# EAGLE board CatFeeder-Com (EAGLE 7.4.0)
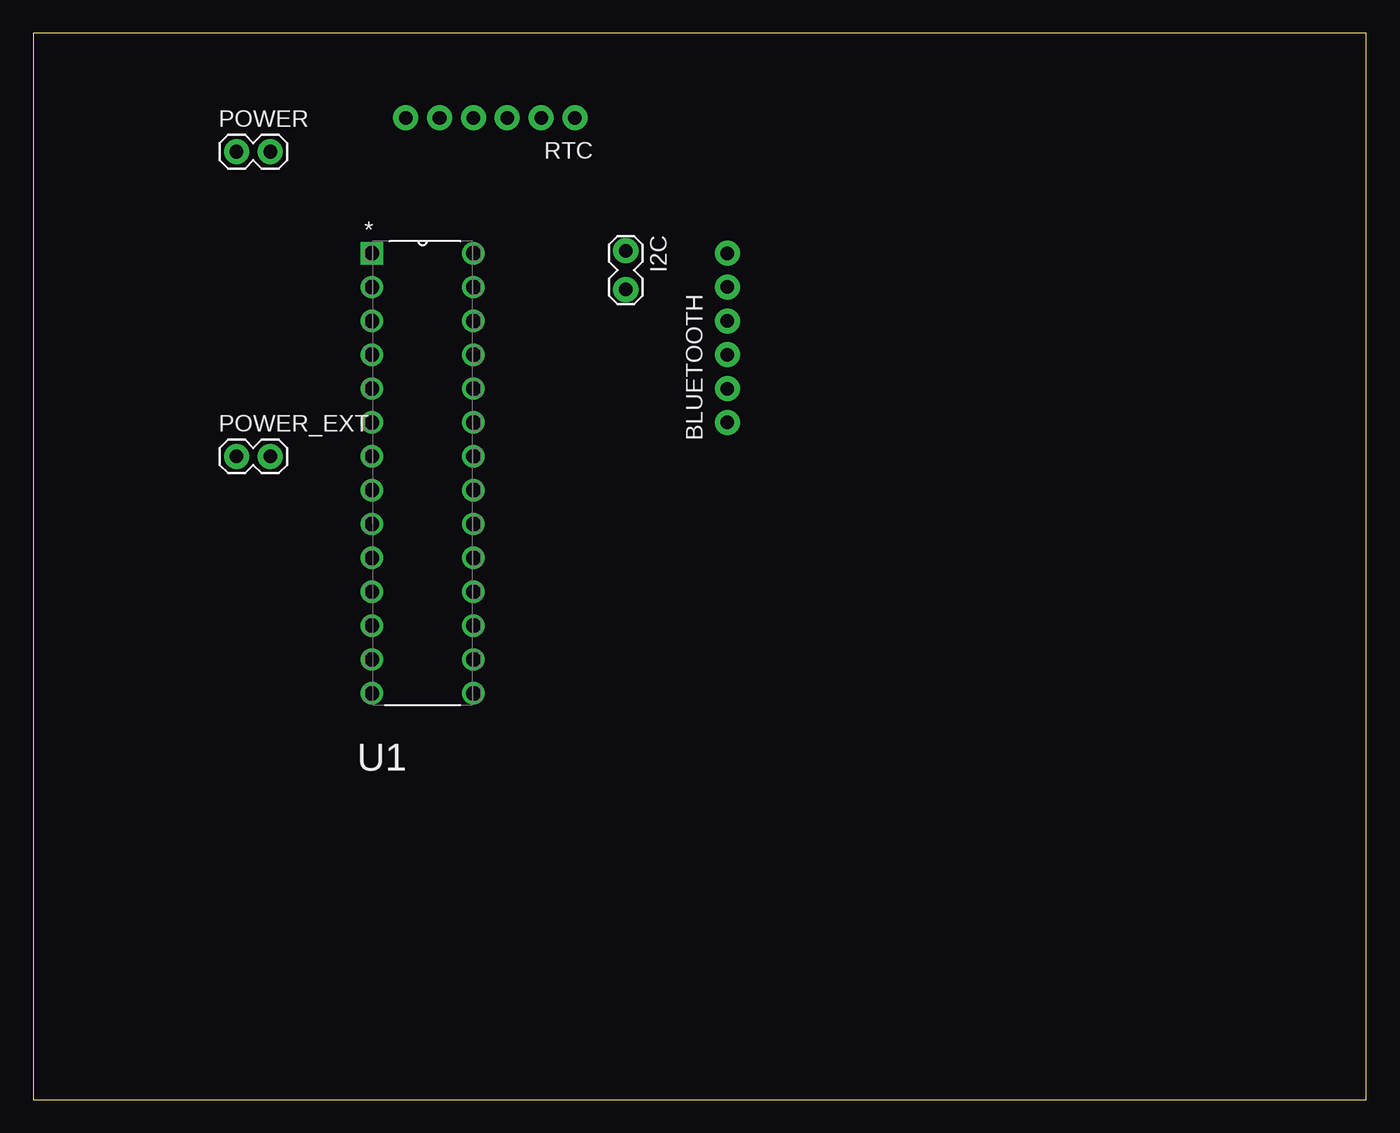
[diagram p0: board, top side]
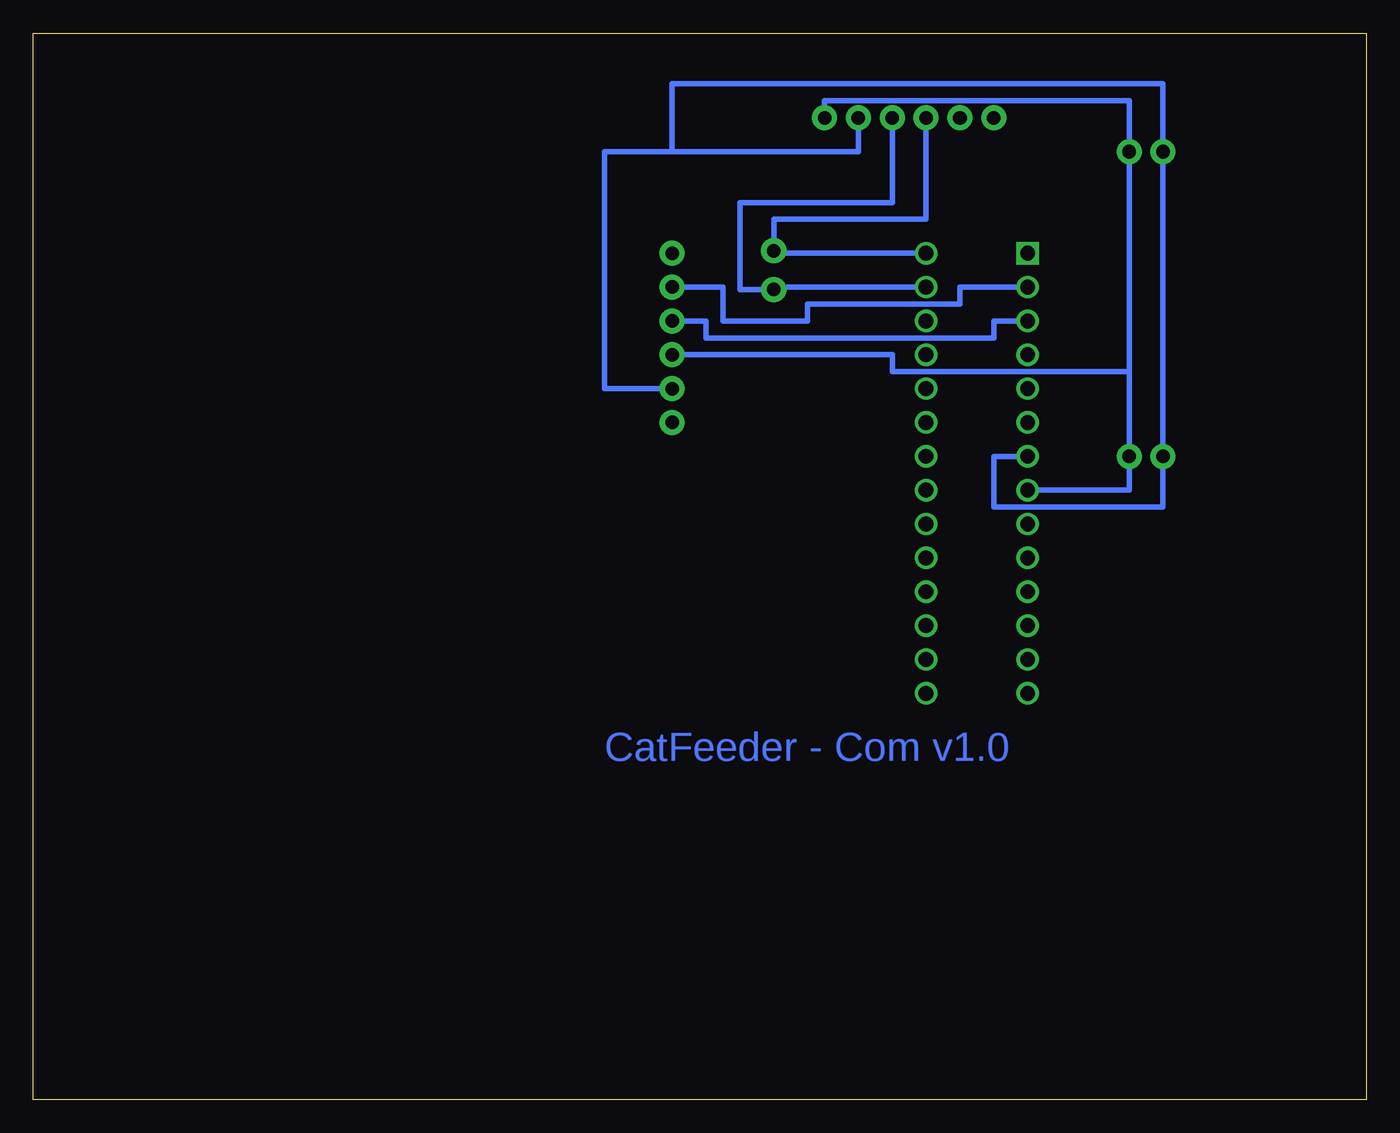
[diagram p1: board, bottom side, seen from below]

Size 100 x 80 mm. Coordinates in mm from the lower left corner, seen from the top.
Outline: 0,0 100,0 100,80 0,80 0,0
Copper layers (1*16): Top 0.035mm / dielectric 1.5mm / Bottom 0.035mm
Design rules "default": minimum track width 10mil, minimum drill 24mil, track to track 8mil, track to pad 8mil, pad to pad 8mil, via to via 8mil, smd to smd 8mil, copper to edge 40mil, drill to drill 8mil, minimum pad ring 10mil, minimum via ring 8mil, stop-mask expansion 4mil, vias tented up to drill 0mil, thermal gap 10mil

## Footprints (pad centres in the part's own frame; a part is rotated, then mirrored left to right if it is on the bottom)
1X06_NO_SILK = drill 1.016 pad 1.88: 1 0,0; 2 2.54,0; 3 5.08,0; 4 7.62,0; 5 10.16,0; 6 12.7,0
1X02_LOCK = drill 1.016 pad 1.88: 1 -0.178,0; 2 2.718,0
1X02 = drill 1.016 pad 1.88: 1 0,0; 2 2.54,0
DIP254P762X457-28 = drill 1.118 square: 1 -7.62,33.02 | drill 1.118: 2 -7.62,30.48; 3 -7.62,27.94; 4 -7.62,25.4; 5 -7.62,22.86; 6 -7.62,20.32; 7 -7.62,17.78; 8 -7.62,15.24; 9 -7.62,12.7; 10 -7.62,10.16; 11 -7.62,7.62; 12 -7.62,5.08; 13 -7.62,2.54; 14 -7.62,0; 15 0,0; 16 0,2.54; 17 0,5.08; 18 0,7.62; 19 0,10.16; 20 0,12.7; 21 0,15.24; 22 0,17.78; 23 0,20.32; 24 0,22.86; 25 0,25.4; 26 0,27.94; 27 0,30.48; 28 0,33.02

## Placement (x,y rotation side)
BLUETOOTH  [1X06_NO_SILK]  52.07,50.8 90 top
I2C  [1X02_LOCK]  44.45,63.5 270 top
POWER  [1X02]  15.24,71.12 0 top
POWER_EXT  [1X02]  15.24,48.26 0 top
RTC  [1X06_NO_SILK]  40.64,73.66 180 top
U1  ATMEGA328P-PU  [DIP254P762X457-28]  33.02,30.48 0 top

## Library data of the parts
BLUETOOTH RTC = SparkFun-Connectors; PROD_ID: CONN-08437
I2C POWER POWER_EXT = SparkFun-Connectors
U1 = Atmel_By_element14_Batch_1-00; MPN: ATMEGA328P-PU; OC_FARNELL: 1715487; OC_NEWARK: 15R0268; PACKAGE: PDIP-28; SUPPLIER: Atmel

## Nets
AVCC: U1.20
I2C: BLUETOOTH.2 POWER.1 POWER_EXT.1 RTC.2 U1.7
N$1: BLUETOOTH.5 U1.2
N$2: BLUETOOTH.4 U1.3
N$3: I2C.1 RTC.4 U1.28
N$4: BLUETOOTH.3 POWER.2 POWER_EXT.2 RTC.1 U1.8
N$5: I2C.2 RTC.3 U1.27

## Tracks (layer width: path | path; a pad name or v marks a point on that pad's centre or on a via)
I2C
  Bottom 0.406: U1.7 27.94,48.26 27.94,44.45 15.24,44.45 POWER_EXT.1 POWER.1 15.24,76.2 52.07,76.2 52.07,71.12 | 52.07,71.12 38.1,71.12 RTC.2 | 52.07,71.12 57.15,71.12 57.15,53.34 BLUETOOTH.2
N$1
  Bottom 0.406: U1.2 30.48,60.96 30.48,59.69 41.91,59.69 41.91,58.42 48.26,58.42 48.26,60.96 BLUETOOTH.5
N$2
  Bottom 0.406: BLUETOOTH.4 49.53,58.42 49.53,57.15 27.94,57.15 27.94,58.42 U1.3
N$3
  Bottom 0.406: U1.28 44.45,63.5 I2C.1 44.45,66.04 33.02,66.04 RTC.4
N$4
  Bottom 0.406: U1.8 17.78,45.72 POWER_EXT.2 17.78,54.61 | 17.78,54.61 POWER.2 17.78,74.93 40.64,74.93 RTC.1 | BLUETOOTH.3 35.56,55.88 35.56,54.61 17.78,54.61
N$5
  Bottom 0.406: U1.27 44.45,60.96 I2C.2 46.99,60.78 46.99,67.31 35.56,67.31 RTC.3

## Text on the board
Bottom: CatFeeder - Com v1.0